# Altium PCB maplemini.PcbDoc
Units mil, origin at the board's own origin, x right, y up, seen from the top; angles counter-clockwise.
Board outline 2020 x 720 mil, 3 copper layers (Top, SUPPLY, Bottom), stack 75.811 mil thick; 37 components, 53 nets, 175 pads, 46 vias.
Unrouted connection lines stored in the file: 18.
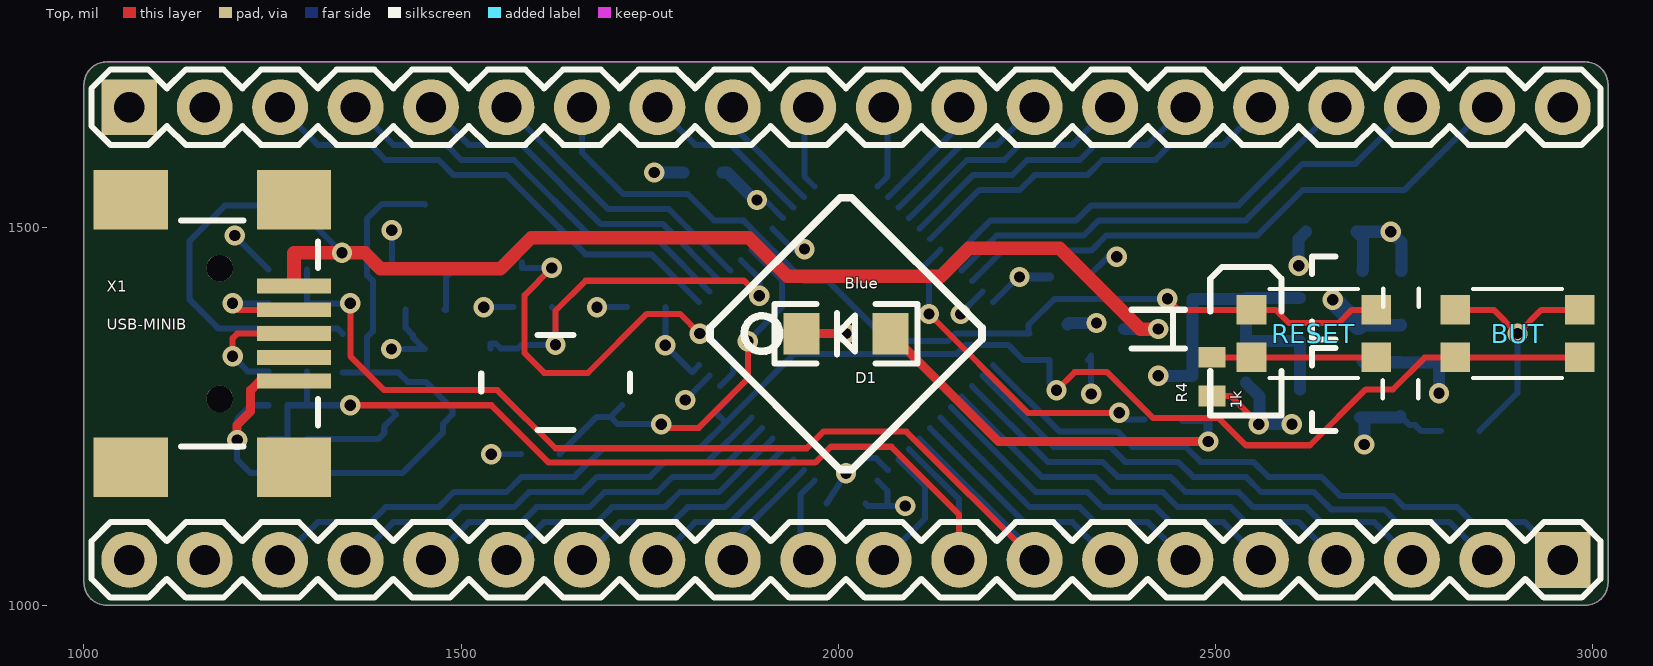
[diagram p0: Top view]
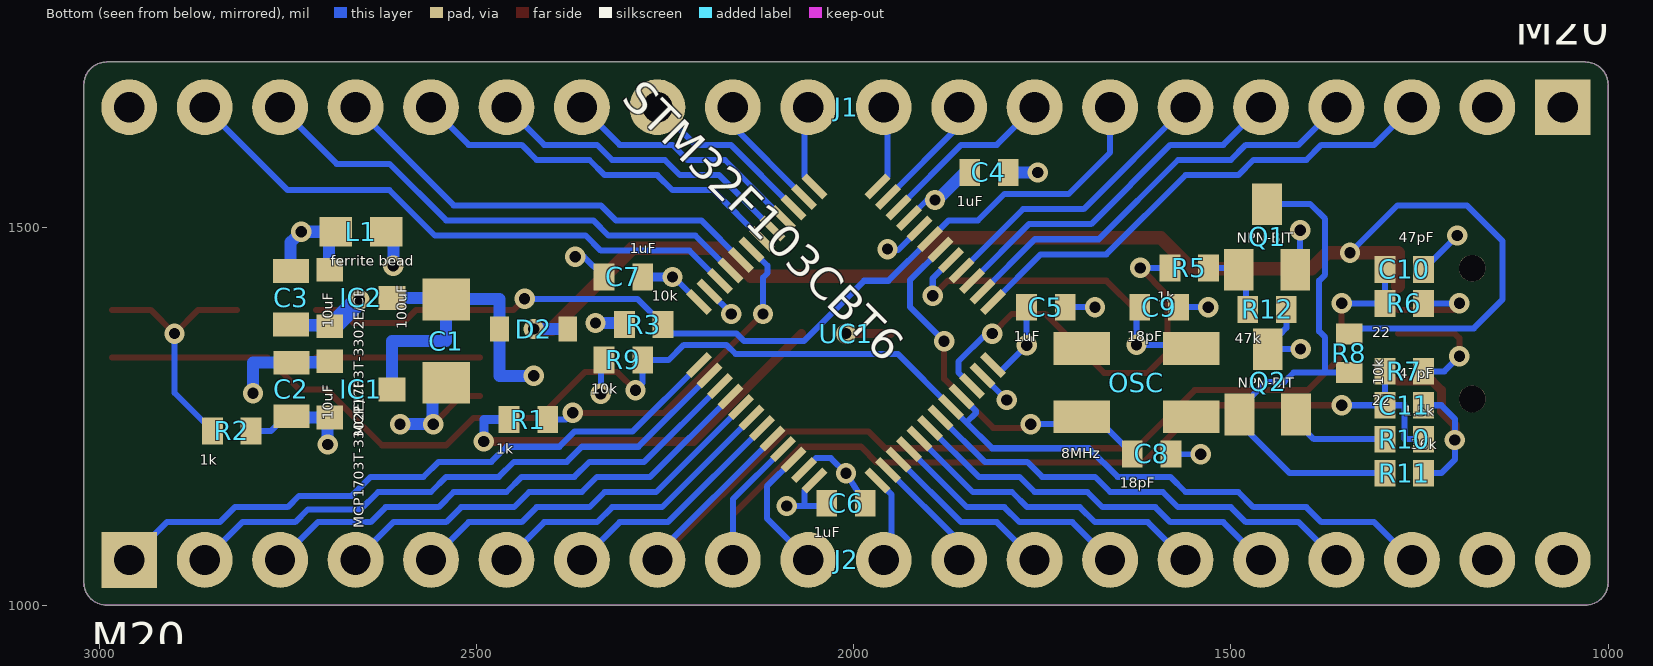
[diagram p1: Bottom view, seen from below]
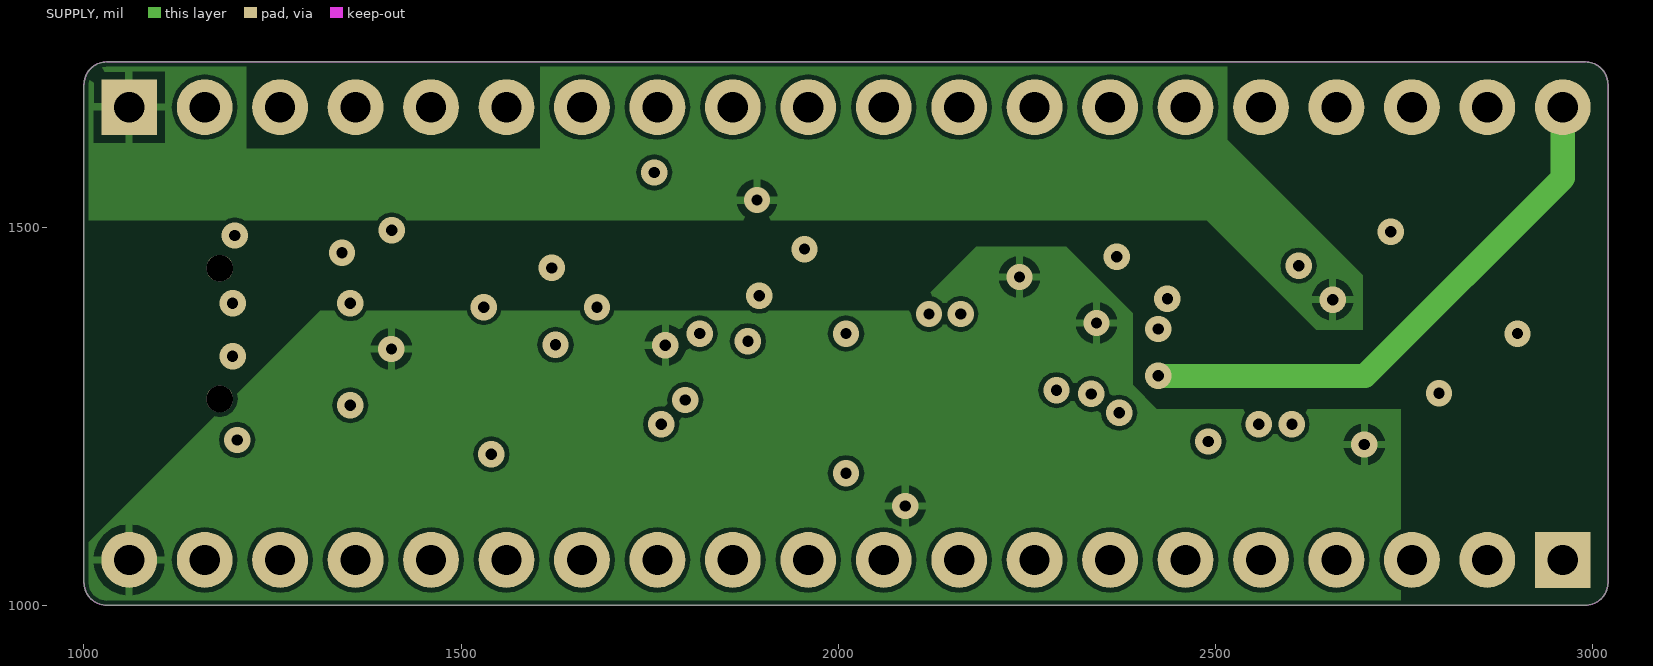
[diagram p2: SUPPLY]

## Layer stack, top to bottom
Top Solder: solder mask 0.4, Solder Resist, Dk 3.5
Top: signal copper 1.378
Dielectric 1: core 59.0551, FR-4, Dk 4.8
SUPPLY: signal copper 1.4
Dielectric2: dielectric 12.6, FR-4, Dk 4.8
Bottom: signal copper 1.378
Bottom Solder: solder mask 0.4, Solder Resist, Dk 3.5

## Board outline
2990,1000 1030,1000 cw(c1030,1030) 1000,1030 1000,1690 cw(c1030,1690) 1030,1720 2990,1720 cw(c2990,1690) 3020,1690 3020,1030 cw(c2990,1030)

## Design rules (kind name [scope] priority, off if disabled: settings)
Clearance [All] p1: gap=6 except(0: SMDPad-SMDPad SMDPad-THPad SMDPad-Via)
Clearance "Clearance (Same Net)" [All] p2: gap=0 except(6: SMDPad-SMDPad SMDPad-THPad SMDPad-Via)
HoleSize HoleSize_1 [All] p1: absolutevalues=TRUE maxlimit=100000 minlimit=15 maxpercent=80.000 minpercent=20.000
HoleSize [All] p2: absolutevalues=TRUE maxlimit=100 minlimit=1 maxpercent=80.000 minpercent=20.000
HoleToHoleClearance mdViaViaSameLayer [All] p1: gap=8 allowstackedmicrovias=TRUE
HoleToHoleClearance [All] p2: gap=10 allowstackedmicrovias=TRUE
PasteMaskExpansion mlMinCreamFrame [All] p1: expansion=0
PasteMaskExpansion [All] p2: expansion=0
PolygonConnect PolygonConnect_1 [All] p1: connectstyle=Relief reliefconductorwidth=10 reliefentries=4 polygonreliefangle="90 Angle" airgapwidth=10
PolygonConnect [All] p2: connectstyle=Relief reliefconductorwidth=10 reliefentries=4 polygonreliefangle="90 Angle" airgapwidth=10
RoutingVias [All] p1: holewidth=28 width=50 viastyle="Through Hole" minholewidth=28 minwidth=50 maxholewidth=28 maxwidth=50
SilkToSilkClearance [All] p1 off: silktosilkclearance=10
SilkToSolderMaskClearance [IsPad] p1 off: minsilkscreentomaskgap=10 clearancetoexposedcopper=TRUE
SolderMaskExpansion mlMinStopFrame [All] p1: expansion=0
SolderMaskExpansion [All] p2: expansion=4
Width Width_1 [All] p1: maxlimit=100000 minlimit=6 preferedwidth=10
Width [All] p2: maxlimit=10 minlimit=10 preferedwidth=10
25 further rules are at their usual default settings.

## Components (designator, comment, footprint, x,y, rotation, side; value= is the part's Value field where it differs from the comment)
BUT "" PUSHBUTTON-KMR241GLFS 2900,1360 r0 top
C1 "100uF" EIA3216 2540,1350 r90 bottom
C2 "10uF" 0805 2745,1286 r90 bottom
C3 "10uF" 0805 2745.5,1407.5 r90 bottom
C4 "1uF" C0402 1820.5,1573.5 r180 bottom
C5 "1uF" C0402 1745,1395 r180 bottom
C6 "1uF" C0402 2010,1135 r180 bottom
C7 "1uF" C0402 2305,1435 r0 bottom
C8 "18pF" C0402 1605,1200.5 r180 bottom
C9 "18pF" C0402 1595,1395 r180 bottom
C10 "47pF" C0402 1270,1445 r0 bottom
C11 "47pF" C0402 1270,1265 r0 bottom
D1 "Blue" LED-1206 2010,1360 r180 top
D2 "" SOD-323 2424,1366 r180 bottom
IC1 "MCP1703T-3302E/CB" SOT23#1 2655,1286 r270 bottom
IC2 "MCP1703T-3302E/CB" SOT23#1 2655,1407.25 r270 bottom
J1 "M20" 1X20 1060,1660 r0 bottom
J2 "M20" 1X20 2960,1060 r180 bottom
L1 "ferrite bead" 0603 2653,1495 r180 bottom
OSC "8MHz" CRYSTAL-SMD-5X3 1625,1295 r180 bottom
Q1 "NPN-BJT" SOT23#2 1452,1488 r180 bottom
Q2 "NPN-BJT" SOT23#2 1451,1296 r180 bottom
R1 "1k" C0402 2431,1246 r180 bottom
R2 "1k" C0402 2824,1231 r180 bottom
R3 "10k" C0402 2278,1372 r0 bottom
R4 "1k" C0402 2495,1303 r90 top
R5 "1k" C0402 1555,1447 r180 bottom
R6 "22" C0402 1270,1400 r180 bottom
R7 "22" C0402 1270,1310 r180 bottom
R8 "10k" C0402 1343,1334 r90 bottom
R9 "10k" C0402 2305,1325 r180 bottom
R10 "1.5k" C0402 1270,1220 r0 bottom
R11 "36k" C0402 1270,1175 r0 bottom
R12 "47k" C0402 1452,1392 r180 bottom
RESET "" PUSHBUTTON-KMR241GLFS 2630,1360 r180 top
UC1 "STM32F103CBT6" LQFP48 2010,1360 r45 bottom
X1 "USB-MINIB" USB-MINIB 1180,1360 r0 top

## Footprints (in the part's own frame and the unit in brackets; to place one, negate y for a bottom-side part, rotate by r counter-clockwise, add the part's x,y. Pads: shape width x height; smd on the part's side, far side on the other; paste and mask are expansions set on the pad)
1X20 [mil] "1X20"
  rect 74x74 hole 40: 1(0,0)
  round 74 hole 40: 2(100,0) 3(200,0) 4(300,0) 5(400,0) 6(500,0) 7(600,0) 8(700,0) 9(800,0) 10(900,0) 11(1000,0) 12(1100,0) 13(1200,0) 14(1300,0) 15(1400,0) 16(1500,0) 17(1600,0) 18(1700,0) 19(1800,0) 20(1900,0)
0603 [mm] "0603"
  rect 1.1x1 smd: 1(-0.85,0) 2(0.85,0)
0805 [mil] "0805"
  rect 31.5x47.24 smd: 1(-35.43,0) 2(35.43,0)
C0402 [mm] "C0402"
  rect 0.7x0.9 smd: 1(-0.65,0) 2(0.65,0)
CRYSTAL-SMD-5X3 [mil] "CRYSTAL-SMD-5X3"
  rect 74.8x43.31 smd: 1(-72.83,-45.28) 2(72.83,-45.28) 3(72.83,45.28) 4(-72.83,45.28)
EIA3216 [mil] "EIA3216"
  rect 55.12x62.99 smd: A(55.12,0) C(-55.12,0)
LED-1206 [mil] "LED-1206"
  rect 47.24x55.12 smd: A(-59.06,0) C(59.06,0)
  silkscreen extent -94,-39 94,39
LQFP48 [mil] "LQFP48"
  rect 10x39.37 smd: 1(-108.27,-167.32) 2(-88.58,-167.32) 3(-68.9,-167.32) 4(-49.21,-167.32) 5(-29.53,-167.32) 6(-9.84,-167.32) 7(9.84,-167.32) 8(29.53,-167.32) 9(49.21,-167.32) 10(68.9,-167.32) 11(88.58,-167.32) 12(108.27,-167.32) 25(108.27,167.32) 26(88.58,167.32) 27(68.9,167.32) 28(49.21,167.32) 29(29.53,167.32) 30(9.84,167.32) 31(-9.84,167.32) 32(-29.53,167.32) 33(-49.21,167.32) 34(-68.9,167.32) 35(-88.58,167.32) 36(-108.27,167.32)
  rect 39.37x10 smd: 13(167.32,-108.27) 14(167.32,-88.58) 15(167.32,-68.9) 16(167.32,-49.21) 17(167.32,-29.53) 18(167.32,-9.84) 19(167.32,9.84) 20(167.32,29.53) 21(167.32,49.21) 22(167.32,68.9) 23(167.32,88.58) 24(167.32,108.27) 37(-167.32,108.27) 38(-167.32,88.58) 39(-167.32,68.9) 40(-167.32,49.21) 41(-167.32,29.53) 42(-167.32,9.84) 43(-167.32,-9.84) 44(-167.32,-29.53) 45(-167.32,-49.21) 46(-167.32,-68.9) 47(-167.32,-88.58) 48(-167.32,-108.27)
PUSHBUTTON-KMR241GLFS [mm] "PUSHBUTTON-KMR241GLFS"
  rect 1x1 smd: P$1(2.1,0.8) P$2(2.1,-0.8) P$3(-2.1,0.8) P$4(-2.1,-0.8)
  silkscreen extent -1.5,-1.5 1.5,1.5
SOD-323 [mil] "SOD-323"
  rect 24.8x32.68 smd: 1(-45.28,0) 2(45.28,0)
SOT23#1 [mil] "SOT23"
  rect 31.5x35.43 smd: 1(-37.4,-39.37) 2(37.4,-39.37) 3(0,43.31)
SOT23#2 [mil] "SOT23"
  rect 39.37x55.12 smd: 1(-37.4,-43.31) 2(37.4,-43.31) 3(0,43.31)
USB-MINIB [mm] "USB-MINIB"
  round 0.9 hole 0.9: 1(0,-2.2) 1(0,2.2)
  rect 2.5x0.5 smd: D+(2.5,0) D-(2.5,0.8) GND(2.5,-1.6) ID(2.5,-0.8) VBUS(2.5,1.6)
  rect 2.5x2 smd: GND@1(-3,-4.5) GND@2(-3,4.5) GND@3(2.5,4.5) GND@4(2.5,-4.5)
  silkscreen extent -1.3,-3.8 3.3,3.8

## Part data
BUT RESET: library part PUSHBUTTON-KMR241GLFS
C1: library part EIA3216
C2 C3: library part 0805
C4 C5 C6 C7 C8 C9 C10 C11 R1 R2 R3 R4 R5 R6 R7 R8 R9 R10 R11 R12: library part C0402
D1: library part LED-1206
D2: library part SOD-323
IC1 IC2 Q1 Q2: library part SOT23
J1 J2: library part 1X20
L1: library part 0603
OSC: library part CRYSTAL-SMD-5X3
UC1: library part LQFP48

## Via types
v1: diameter 27/35/27 (per signal layer), hole 15, Top to Bottom, 46 vias

## Nets (pads, with @x,y where several pads share a name; then routed paths per layer and width w, separated by ;. In a path a pad name is that pad's centre, name@x,y a point inside that pad or via, vN(x,y) a via of type N, cw(c..) or ccw(c..) an arc to the next point about the centre after c; other vN are vias at no path point)
0: J1.19 UC1.22 | length 778.4
  Bottom w8: UC1.22 2217.44,1470 2335,1470 2355,1490 2555,1490 2615,1550 2750,1550 J1.19
1: J1.18 UC1.21 | length 686.6
  Bottom w8: UC1.21 2209.6,1490 2325,1490 2345,1510 2540,1510 2615,1585 2685,1585 J1.18
2: J1.17 UC1.20 | length 594.7
  Bottom w8: UC1.20 2201.76,1510 2315,1510 2335,1530 2530,1530 J1.17
3: J1.16 UC1.18 | length 511
  Bottom w8: UC1.18 2186.08,1550 2240,1550 2260,1570 2330,1570 2350,1590 2420,1590 2440,1610 2510,1610 J1.16
4: J1.15 UC1.17 | length 419.2
  Bottom w8: UC1.17 2178.24,1570 2230,1570 2250,1590 2320,1590 2340,1610 2410,1610 J1.15
5: J1.14 UC1.16 | length 327.3
  Bottom w8: UC1.16 2170.4,1590 2220,1590 2240,1610 2310,1610 J1.14
6: J1.13 UC1.15 | length 235.5
  Bottom w8: UC1.15 2162.56,1610 2210,1610 J1.13
7: J1.12 UC1.14 | length 158.1
  Bottom w8: UC1.14@2065.68,1540.95 2160,1635.28 J1.12
8: J1.11 UC1.13 | length 112.7
  Bottom w8: UC1.13 2065,1568.12 2065,1655 J1.11
9: J1.10 UC1.12 | length 112.7
  Bottom w8: J1.10 1955,1655 1955,1568.11 UC1.12
10: J1.9 UC1.11 | length 158.1
  Bottom w8: J1.9 1860,1635.27 UC1.11@1954.32,1540.95
11: J1.8 UC1.10 | length 235.5
  Bottom w8: J1.8 1810,1610 1857.44,1610 UC1.10
12: J1.6 UC1.4 | length 386.6
  Bottom w8: J1.6 1695,1525 1775.41,1525 UC1.4
13: J1.5 UC1.3 | length 478.4
  Bottom w8: J1.5 1510,1610 1580,1610 1685,1505 1767.56,1505 UC1.3
14: J1.4 UC1.2 | length 570.3
  Bottom w8: J1.4 1410,1610 1480,1610 1500,1590 1570,1590 1675,1485 1759.73,1485 UC1.2@1829.05,1415.68
15: J2.17 UC1.43 | length 602.9
  Bottom w8: J2.17 1410,1110 1480,1110 1500,1130 1570,1130 1590,1150 1660,1150 1680,1170 1750,1170 1770,1190 1826.08,1190 UC1.43
16: J2.16 UC1.42 | length 511
  Bottom w8: J2.16 1510,1110 1580,1110 1600,1130 1670,1130 1690,1150 1760,1150 1780,1170 1833.91,1170 UC1.42
17: J2.15 UC1.41 | length 419.2
  Bottom w8: J2.15 1610,1110 1680,1110 1700,1130 1770,1130 1790,1150 1841.76,1150 UC1.41
18: J2.14 UC1.40 | length 327.3
  Bottom w8: J2.14 1710,1110 1780,1110 1800,1130 1849.59,1130 UC1.40
19: J2.13 UC1.39 | length 235.5
  Bottom w8: J2.13 1810,1110 1857.43,1110 UC1.39
20: J2.12 UC1.38 | length 158.1
  Bottom w8: J2.12 1860,1084.73 UC1.38@1954.32,1179.05
21: J2.11 UC1.37 | length 119.8
  Bottom w8: J2.11 1955,1065 1950,1065 1950,1146.89 UC1.37
22: J2.10 UC1.34 | length 170.4
  Bottom w8: J2.10 2115,1115 2115,1157.56 UC1.34
23_USBDP: C11.2 J2.9 R7.1 R10.1 UC1.33 | length 1317.5
  Top w8: v1(1353,1265) 1540,1265 1616,1189 1969,1189 1990,1210 2070,1210 2160,1120 J2.9
  Bottom w8: R10.1 1270,1220 1270,1265 C11.2 ; R7.1 C11.2 ; v1(1353,1265) C11.2 ; UC1.33 2160,1140.41 J2.9
24_USBDM: C10.2 J2.8 R6.1 UC1.32 | length 1433.5
  Top w8: v1(1353,1400) 1353,1330 1398,1285 1548,1285 1625,1208 1958,1208 1980,1230 2090,1230 J2.8
  Bottom w8: C10.2 R6.1 v1(1353,1400) ; UC1.32 2260,1068.24 J2.8
25: J2.7 UC1.31 | length 311
  Bottom w8: UC1.31 2246.08,1110 2310,1110 J2.7
26: J2.6 UC1.30 | length 402.9
  Bottom w8: UC1.30 2253.92,1130 2320,1130 2340,1110 2410,1110 J2.6
27: J2.5 UC1.29 | length 494.7
  Bottom w8: UC1.29 2261.76,1150 2330,1150 2350,1130 2420,1130 2440,1110 2510,1110 J2.5
28: J2.4 UC1.28 | length 586.6
  Bottom w8: UC1.28 2269.59,1170 2340,1170 2360,1150 2430,1150 2450,1130 2520,1130 2540,1110 2610,1110 J2.4
29: J2.3 UC1.27 | length 678.4
  Bottom w8: UC1.27 2277.44,1190 2350,1190 2370,1170 2440,1170 2460,1150 2530,1150 2550,1130 2620,1130 2640,1110 2710,1110 J2.3
30: J2.2 UC1.26 | length 770.3
  Bottom w8: UC1.26@2190.95,1304.32 2285.27,1210 2360,1210 2380,1190 2450,1190 2470,1170 2540,1170 2560,1150 2630,1150 2653,1127 2723,1127 2740,1110 2810,1110 J2.2
31: J2.1 UC1.25 | length 862.1
  Bottom w8: UC1.25 2293.11,1230 2370,1230 2390,1210 2460,1210 2480,1190 2550,1190 2570,1170 2640,1170 2665,1145 2735,1145 2750,1130 2820,1130 2840,1110 2910,1110 J2.1
32: BUT.P$2 BUT.P$4 J2.18 R9.2 UC1.44 UC1.45 | length 2030.5
  Top w8: v1(2289,1285) 2313,1309 2356,1309 2417,1248 2504,1248 2540,1212 2625,1212 2699,1286 2735,1286 2777,1328 2816.82,1328 BUT.P$4 BUT.P$2
  Bottom w8: J2.18 1310,1110 1380,1110 1400,1130 1470,1130 1490,1150 1560,1150 1580,1170 1650,1170 1688,1208 1710,1208 ; 1709,1208 1710,1208 ; UC1.45 1837.5,1257.1 1837.5,1255 1850.37,1242.13 ; v1(2289,1285) 2279.41,1294.59 R9.2 2245,1325 2225,1345 2168.5,1345 2156.5,1333 1941.24,1333 UC1.44 1850.37,1242.13 ; 1710,1208 1816.24,1208 1850.37,1242.13
33: R1.2 UC1.19 | length 440.1
  Top w8: v1(2120,1386) 2251,1255 v1(2372,1255)
  Bottom w8: v1(2120,1386) 2120,1434 2114,1440 2114,1450.08 UC1.19 ; v1(2372,1255) 2381,1246 R1.2
+5V/2: D2.2 R8.2 X1.VBUS | length 1955
  Top w12: v1@2422.5,1365 2422,1365.5 v1(2424,1366)
  Top w18: X1.VBUS 1278.43,1467 ; v1(1342,1467) 1278.43,1467 ; v1(2424,1366) 2400,1366 2293,1473 2173,1473 2136,1436 1932,1436 1881,1487 1593,1487 1552,1446 1393,1446 1372,1467 1278.43,1467
  Bottom w8: v1(1342,1467) 1279,1530 1187,1530 1140,1483 1140,1405 1178,1367 1335.59,1367 R8.2
  Bottom w16: D2.2 v1(2424,1366)
AV+: C3.1 C4.1 IC2.2 J1.1 UC1.9 | length 212.2
  Bottom w8: v1(1892,1537) 1902.59,1537 UC1.9
  Bottom w16: C4.1 1852.5,1573.5 1889,1537 v1(1892,1537) ; IC2.2@2689,1371 IC2.2@2694.37,1371 ; IC2.2 IC2.2@2694.37,1371 ; C3.1 2745.5,1371 IC2.2@2694.37,1371
  Bottom w26: v1(2655,1405) IC2.2@2689,1371
AV-: C3.2 C4.2 IC2.1 J1.2 L1.1 UC1.8 | length 255.1
  Bottom w8: UC1.8 1941,1470.76 v1(1955,1472)
  Bottom w16: v1(1755.9,1573.5) C4.2 ; IC2.1@2694.37,1443 IC2.1 2695,1445.28 2695,1490 2691.46,1490 L1.1 v1(2732,1495) 2746,1481 2746,1443 2745.5,1443 C3.2
DGND: C1.C C2.2 C5.2 C6.2 C7.2 C8.2 C9.2 C10.1 C11.1 D1.C IC1.1 J2.19 L1.2 Q1.2 R4.1 R9.1 R11.1 UC1.23 UC1.35 UC1.47 X1.GND | length 1276.2
  Top w8: R4.1 2519.59,1277.41 v1(2557,1240)
  Top w12: v1(1203,1219) 1203,1239 1221,1257 1221,1285 1233.01,1297.01 X1.GND ; D1.C v1(2010,1360)
  Bottom w8: v1(1200,1490) 1200,1489.41 C10.1 ; R11.1 1221,1175 1203,1193 v1(1203,1219) 1203,1247 1221,1265 C11.1 ; v1(1408,1497) 1408,1451.29 Q1.2 ; v1(1530,1395) C9.2 ; v1(1540,1200) 1538.91,1200 C8.2 ; v1(1680,1395) C5.2 ; v1(1797,1272) 1800,1275.27 UC1.47@1829.05,1304.32 ; C6.2 v1(2010,1175) 2030,1195 2049.73,1195 UC1.35@2065.68,1179.05 ; v1(2162,1386) 2161.27,1386 UC1.23@2190.95,1415.68 ; R9.1 2335,1330.59 v1(2335,1280) ; C7.2 2357.59,1462 v1(2369,1462)
  Bottom w16: C1.C 2558,1276.88 2558,1241 v1(2557,1240) v1@2602,1240 ; v1(2610,1450) 2610,1485.46 L1.2 ; IC1.1 2695.77,1322 2744.43,1322 C2.2 2796,1321.43 v1(2796,1281)
  other v1: 2601,1240
DISC: R5.1 UC1.46 | length 561
  Top w8: v1(1620,1447) 1584,1411 1584,1334 1610,1308 1668,1308 1746,1386 1790,1386 v1(1816,1360)
  Bottom w8: R5.1@1580.59,1454.41 R5.1 v1(1620,1447) ; v1(1816,1360) 1824,1360 1861,1323 1861,1308.43 UC1.46
N$1: BUT.P$1 BUT.P$3 R2.1 | length 341.3
  Top w8: BUT.P$3 2868.5,1391.5 v1(2900,1360) 2931.5,1391.5 BUT.P$1
  Bottom w8: R2.1 2900,1281.41 v1(2900,1360)
N$2: D1.A R1.1 | length 542.6
  Top w12: D1.A 2212.06,1217 v1(2490,1217)
  Bottom w12: R1.1 2490,1246 v1(2490,1217)
N$4: R4.2 RESET.P$1 RESET.P$3 | length 217.7
  Top w8: R4.2 2495.09,1328.5 RESET.P$1 RESET.P$3
N$51: Q2.2 R10.2 | length 152.5
  Bottom w8: R10.2 1390,1220 1398,1228 1398,1237.09 Q2.2 1403.29,1264 Q2.2@1403,1264
N$59: R6.2 X1.D- | length 132.4
  Top w8: v1(1197,1400) 1205.5,1391.5 X1.D-
  Bottom w8: v1(1197,1400) R6.2
N$60: R7.2 X1.D+ | length 163.6
  Top w8: v1(1197,1330) 1197,1354 1203,1360 X1.D+
  Bottom w8: v1(1197,1330) 1217,1310 R7.2
N$71: Q1.3 Q2.1 R8.1 R11.2 | length 702.5
  Bottom w8: R11.2 1422,1175 1476,1229 1476,1240.29 Q2.1 1488.4,1260.6 1453,1296 1429,1296 1416.59,1308.41 1373,1308.41 ; R8.1 1373,1308.41 ; Q1.3 1451.31,1532 1395,1532 1375,1512 1375,1438 1383,1430 1383,1363 1375,1355 1375,1308.41 1373,1308.41
N$73: Q1.1 R5.2 R12.1 | length 101.4
  Bottom w8: R12.1 1478.59,1391 1480,1391 1480,1435.29 Q1.1 1491.71,1447 R5.2
OSC_IN: C9.1 OSC.3 UC1.5 | length 546.6
  Top w8: v1(1625,1345) 1625,1390 1665,1430 1875,1430 v1(1895,1410)
  Bottom w8: OSC.3@1539,1340.28 1539,1347 1545.44,1347 OSC.3 1575.28,1340.28 1580,1345 v1(1625,1345) 1625,1390.59 C9.1 ; UC1.5 1895,1433.24 v1(1895,1410)
OSC_OUT: C8.1 OSC.1 UC1.6 | length 531.1
  Top w8: v1(1765,1240) 1770,1235 1815,1235 1880,1300 v1(1880,1350)
  Bottom w8: C8.1 1679.82,1249.72 OSC.1 ; OSC.1@1713.11,1265 OSC.1 ; v1(1765,1240) 1707.56,1240 OSC.1 ; v1(1880,1350) 1925,1395 1925,1431.08 UC1.6
RESET: J1.7 R3.1 RESET.P$2 RESET.P$4 UC1.7 | length 1268.1
  Top w8: v1(2436,1406) 2450.5,1391.5 RESET.P$2 2547.82,1391 2580,1391 2597,1374 2663,1374 2680.5,1391.5 RESET.P$4
  Bottom w8: J1.7 1660,1600 1715,1545 1800,1545 1835,1510 1873.92,1510 UC1.7 1953.92,1430 1986,1430 2066,1350 2145,1350 2155,1360 2253,1360 2252,1361 2252,1371.59 R3.1 2286.41,1406 v1(2436,1406)
VBAT: J1.3 UC1.1 | length 662.1
  Bottom w8: J1.3 1310,1610 1380,1610 1400,1590 1470,1590 1490,1570 1560,1570 1665,1465 1751.89,1465 UC1.1
VCC: C2.1 C5.1 C6.1 C7.1 IC1.2 J2.20 Q2.3 R2.2 R3.2 R12.2 UC1.24 UC1.36 UC1.48 | length 605.6
  Bottom w8: v1(1407.5,1339.5) 1407.69,1339.31 Q2.3@1451.69,1339.31 ; R12.2 1426.41,1367.59 1436,1358 1436,1355 Q2.3@1451.69,1339.31 ; Q2.3 Q2.3@1451.69,1339.31 ; C5.1@1770.59,1394.41 C5.1 ; C5.1@1771.5,1393.5 C5.1 ; UC1.48 1815.13,1318.13 1806,1309 v1(1770.5,1344.5) 1770.59,1344.59 C5.1 ; C6.1@2038.09,1132.5 C6.1 2039.09,1131.5 2065,1131.5 ; UC1.36 2065,1151.89 2065,1131.5 ; v1@2088.5,1128.39 v1(2088.5,1131.5) 2065,1131.5 ; UC1.24 2238.11,1435 v1(2240,1435) ; C2.1 2756.57,1239 2764,1239 2772,1231 R2.2
  Bottom w12: v1(2240,1435) C7.1 C7.1@2280,1435
  Bottom w16: R3.2 2305.59,1374 v1(2342,1374) ; IC1.2@2691.4,1248.6 IC1.2 2694.37,1249 IC1.2@2697,1249 ; v1(2697,1213) IC1.2@2697,1249 ; C2.1 2745,1249 IC1.2@2697,1249
VIN: C1.A D2.1 IC1.3 IC2.3 J1.20 | length 1224.7
  SUPPLY w32: v1(2424,1304) 2698,1304 2960,1566 J1.20
  Bottom w16: v1(2424,1304) 2468,1304 2468,1305 ; 2469,1304 2468,1305 ; C1.A@2538,1404 C1.A@2540,1404 ; IC1.3 2611.69,1350 2540,1350 C1.A@2540,1404 ; IC2.3 2611.69,1407 2540,1407 C1.A ; 2468,1305 2469.28,1306.28 D2.1 2469.28,1406 2540,1406 C1.A ; C1.A@2540,1404 C1.A
pads on no net: OSC.2 OSC.4 X1.1 X1.GND@1 X1.GND@2 X1.GND@3 X1.GND@4 X1.ID

## Polygon pours and split planes (outlines as drawn)
VCC on SUPPLY "SUPPLY-VCC" (solid, remove dead copper, pour order 0): 2745,1260 2745,995 995,995 995,1072.07 1312.93,1390 2097.93,1390 2182.93,1475 2302.07,1475 2390,1387.07 2390,1292.07 2422.07,1260
AV+ on SUPPLY "SUPPLY-AV+" (solid, remove dead copper, pour order 2): 995,1725 995,1510 2487.93,1510 2632.93,1365 2695,1365 2695,1437.07 2515,1617.07 2515,1725 1605,1725 1605,1605 1215,1605 1215,1725
AV- on GND "GND-AV-" (solid, remove dead copper, pour order 4): 2702.93,1455 2755,1455 2755,1522.07 2567.07,1710 1605,1710 1605,1605 1215,1605 1215,1720 1010,1720 1010,1545 1812.93,1545 1842.93,1515 1872.93,1515 1952.93,1435 2077.07,1435 2167.07,1525 2307.07,1525 2367.07,1585 2572.93,1585
DGND on GND "GND-DGND" (solid, remove dead copper, pour order 6): 1011,1011 3009,1011 3009,1709 2590.34,1709 2766,1533.34 2766,1444 2696.66,1444 2566.66,1574 2373.34,1574 2313.34,1514 2173.34,1514 2083.34,1424 1946.66,1424 1866.66,1504 1836.66,1504 1806.66,1534 1011,1534

## Keep-outs
Keep-Out Layer:
  the board outline again, w0

## Silkscreen, mask and mechanical layers (free items; w line width, h text height)
Dimension:
  the board outline again, w0
_tsilk:
  drawing of 1889 lines, arcs and shapes, not listed
  text "av+" at 1016,1583 h27.2
  text "av-" at 1115,1583 h27.2
  text "vbat" at 1210,1583 h27.2
  text "14" at 1340,1583 h27.2
  text "13" at 1430,1583 h27.2
  text "12" at 1530,1583 h27.2
  text "11" at 1730,1583 h27.2
  text "10" at 1830,1583 h27.2
  text "9" at 1950,1583 h27.2
  text "8" at 2050,1583 h27.2
  text "7" at 2150,1583 h27.2
  text "6" at 2250,1583 h27.2
  text "5" at 2350,1583 h27.2
  text "4" at 2450,1583 h27.2
  text "3" at 2550,1583 h27.2
  text "2" at 2650,1583 h27.2
  text "1" at 2750,1583 h27.2
  text "0" at 2850,1583 h27.2
  text "vin" at 2924,1583 h27.2
  text "max" at 2921,1551 h27.2
  text "pwm" at 1720,1538 h27.2
  text "pwm" at 1820,1538 h27.2
  text "pwm" at 1920,1538 h27.2
  text "pwm" at 2020,1538 h27.2
  text "pwm" at 2320,1538 h27.2
  text "pwm" at 2420,1538 h27.2
  text "pwm" at 2520,1538 h27.2
  text "tx3" at 2720,1538 h27.2
  text "rx3" at 2820,1538 h27.2
  text "5v" at 2921,1511 h27.2
  text "ain" at 1725,1493 h27.2
  text "ain" at 1825,1493 h27.2
  text "ain" at 1925,1493 h27.2
  text "ain" at 2025,1493 h27.2
  text "ain" at 2125,1493 h27.2
  text "ain" at 2225,1493 h27.2
  text "ain" at 2325,1493 h27.2
  text "ain" at 2425,1493 h27.2
  text "ain" at 2525,1493 h27.2
  text "scl" at 2720,1493 h27.2
  text "sda" at 2820,1493 h27.2
  text "reset" at 1673,1481 h27.2 r90
  text "boot1" at 2670.19,1465.7 h27.2 r90
  text "tx2" at 1924,1448 h27.2
  text "rx2" at 2025,1448 h27.2
  text "ss" at 2132.5,1448 h27.2
  text "sck" at 2205,1448 h27.2
  text "miso" at 2293.5,1448 h27.2
  text "mosi" at 2407,1448 h27.2
  text "i2c2" at 2762,1448 h27.2
  text "spi1" at 2260.5,1403 h27.2
  text "LeafLabs" at 1510,1360 h46.75
  text "Maple Mini" at 1517,1313 h28.9
  text "r3" at 1828,1313 h27.2
  text "d1=33" at 1939.5,1278.5 h27.2
  text "reset" at 2568,1260 h27.2
  text "but=32" at 2821,1260 h27.2
  text "i2c1" at 1367.5,1235.5 h27.2
  text "sda" at 1334,1195 h27.2
  text "scl" at 1426,1195 h27.2
  text "usb" at 2169,1195 h27.2
  text "rx1" at 2322,1195 h27.2
  text "tx1" at 2420,1195 h27.2
  text "spi2" at 2755.5,1195 h27.2
  text "pwm" at 1334,1150 h27.2
  text "pwm" at 1426,1150 h27.2
  text "dp" at 2130,1150 h27.2
  text "dm" at 2230,1150 h27.2
  text "pwm" at 2320,1150 h27.2
  text "pwm" at 2420,1150 h27.2
  text "pwm" at 2520,1150 h27.2
  text "mosi" at 2615,1150 h27.2
  text "miso" at 2730,1150 h27.2
  text "sck" at 2845,1150 h27.2
  text "ss" at 2940,1150 h27.2
  text "vcc" at 1015,1106 h27.2
  text "gnd" at 1114,1106 h27.2
  text "but" at 1222,1106 h27.2
  text "15" at 1337.5,1105 h27.2
  text "16" at 1434,1105 h27.2
  text "17" at 1534,1105 h27.2
  text "18" at 1634,1105 h27.2
  text "19" at 1734,1105 h27.2
  text "20" at 1834,1105 h27.2
  text "21" at 1934,1105 h27.2
  text "22" at 2034,1105 h27.2
  text "23" at 2134,1105 h27.2
  text "24" at 2234,1105 h27.2
  text "25" at 2334,1105 h27.2
  text "26" at 2434,1105 h27.2
  text "27" at 2534,1105 h27.2
  text "28" at 2634,1105 h27.2
  text "29" at 2734,1105 h27.2
  text "30" at 2839,1105 h27.2
  text "31" at 2934,1105 h27.2
_bsilk:
  lines w6: 1195,1370 1220,1380 ; 1200,1245 1220,1260 ; 1205,1260 1220,1260 ; 1210,1385 1220,1380 ; 1215,1245 1220,1260 ; 1215,1370 1220,1380 ; 1290,1350 1315,1350 ; 1305,1340 1315,1350 ; 1305,1360 1315,1350 ; 1725,1220 1745,1220 1745,1240 ; 2330,1390 2325,1395 ; 2330,1405 2325,1395 ; 2345,1400 2325,1395